# EAGLE board hello-world (EAGLE 6.6.0)
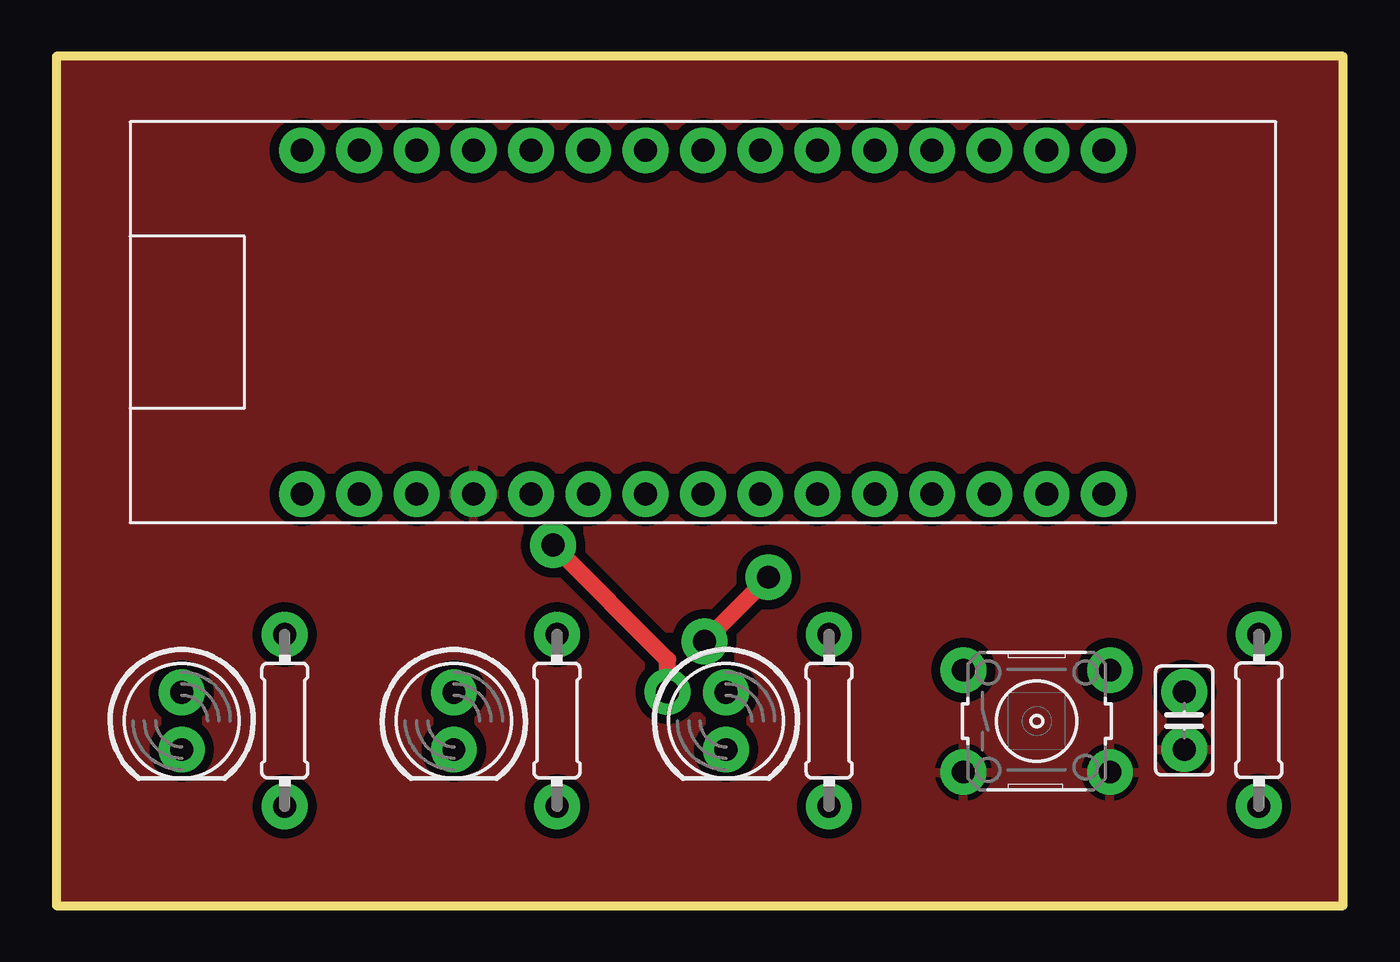
[diagram p0: board, top side]
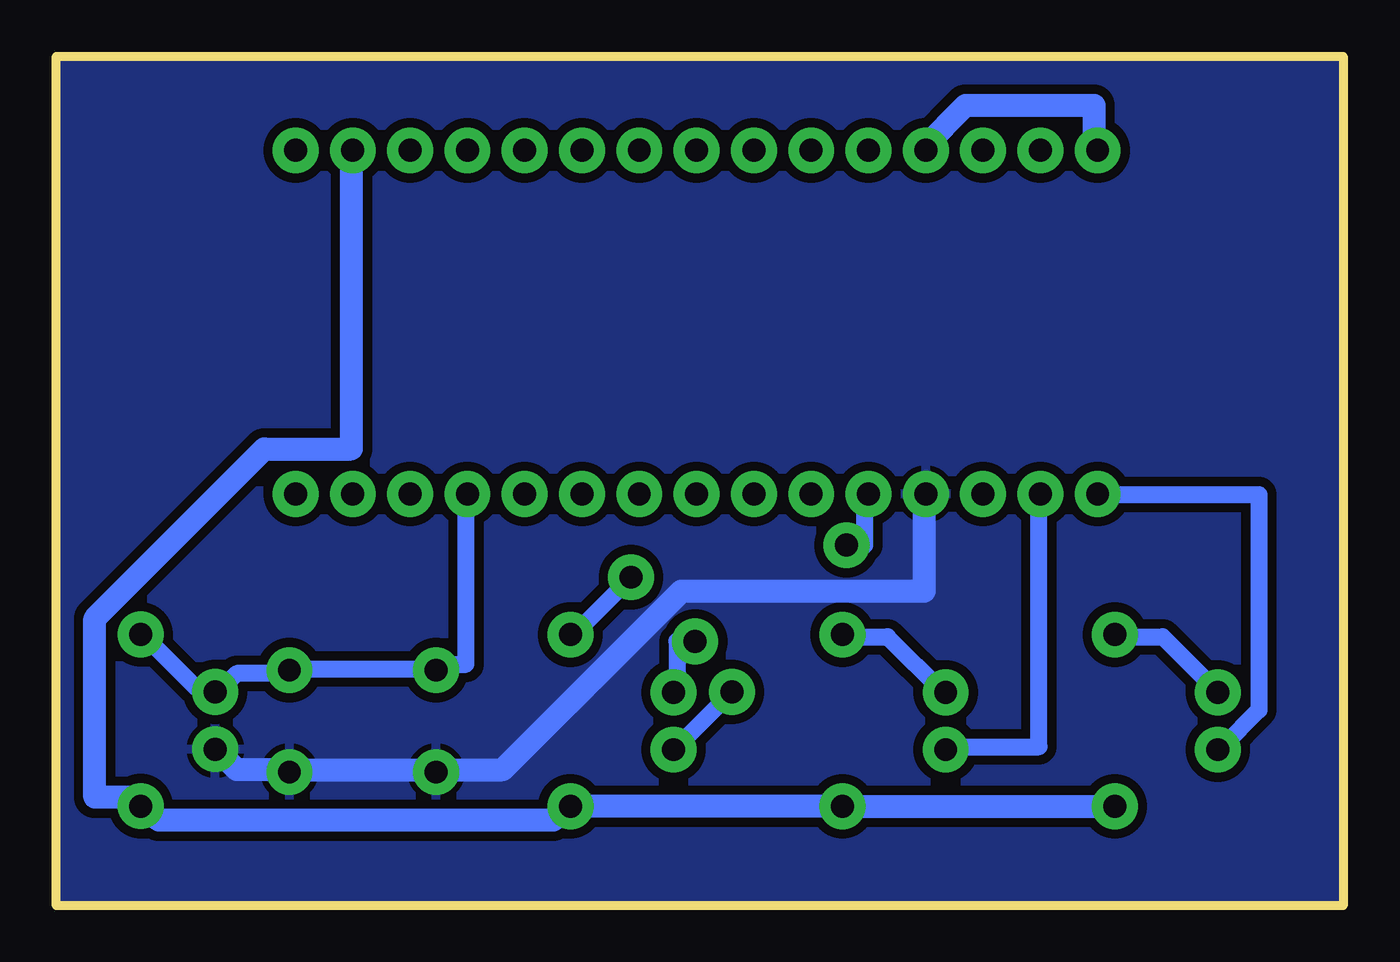
[diagram p1: board, bottom side, seen from below]

Size 57.04 x 37.65 mm. Coordinates in mm from the lower left corner, seen from the top.
Outline: 0,0 57.04,0 57.04,37.65 0,37.65 0,0
Copper layers (1*16): Top 0.035mm / dielectric 1.5mm / Bottom 0.035mm
Design rules "jitpcb": minimum track width 10mil, minimum drill 24mil, track to track 10mil, track to pad 10mil, pad to pad 10mil, via to via 10mil, smd to smd 10mil, copper to edge 0mil, drill to drill 8mil, minimum pad ring 10mil, minimum via ring 8mil, stop-mask expansion 4mil, vias tented up to drill 0mil, thermal gap 10mil
Net classes: 0 default: width 0.762 mm, drill 1.016 mm, clearance 0.406 mm; 1 power: width 1.016 mm, drill 1.016 mm, clearance 0.406 mm to class 0, clearance 0.406 mm

## Footprints (pad centres in the part's own frame; a part is rotated, then mirrored left to right if it is on the bottom)
C025-025X050 = drill 1.016 pad 2.032: 1 -1.27,0; 2 1.27,0
NUCLEO32_DIP = drill 1.016 pad 2.032: CN3_1 -17.78,-7.62; CN3_2 -15.24,-7.62; CN3_3 -12.7,-7.62; CN3_4 -10.16,-7.62; CN3_5 -7.62,-7.62; CN3_6 -5.08,-7.62; CN3_7 -2.54,-7.62; CN3_8 0,-7.62; CN3_9 2.54,-7.62; CN3_10 5.08,-7.62; CN3_11 7.62,-7.62; CN3_12 10.16,-7.62; CN3_13 12.7,-7.62; CN3_14 15.24,-7.62; CN3_15 17.78,-7.62; CN4_1 -17.78,7.62; CN4_2 -15.24,7.62; CN4_3 -12.7,7.62; CN4_4 -10.16,7.62; CN4_5 -7.62,7.62; CN4_6 -5.08,7.62; CN4_7 -2.54,7.62; CN4_8 0,7.62; CN4_9 2.54,7.62; CN4_10 5.08,7.62; CN4_11 7.62,7.62; CN4_12 10.16,7.62; CN4_13 12.7,7.62; CN4_14 15.24,7.62; CN4_15 17.78,7.62
LED5MM = drill 1.016 pad 2.032: A -1.27,0; K 1.27,0
0204/7 = drill 1.016 pad 2.032: 1 -3.81,0; 2 3.81,0
B3F-10XX = drill 1.016 pad 2.032: 1 -3.251,2.261; 2 3.251,2.261; 3 -3.251,-2.261; 4 3.251,-2.261

## Placement (x,y rotation side)
C27  100nf  [C025-025X050]  50,8.21 90 top
C36  [NUCLEO32_DIP]  28.66,25.87 0 top
LED1  [LED5MM]  5.55,8.19 270 top
LED9  [LED5MM]  17.62,8.19 270 top
LED17  [LED5MM]  29.69,8.19 270 top
R2  1k  [0204/7]  10.12,8.21 270 top
R10  1k  [0204/7]  22.19,8.21 270 top
R18  1k  [0204/7]  34.26,8.21 270 top
R26  1k  [0204/7]  53.31,8.22 270 top
SW25  [B3F-10XX]  43.46,8.18 0 top

## Library data of the parts
C27 R2 R10 R18 R26 = rcl
C36 = nucleo
LED1 LED9 LED17 = led
SW25 = switch-omron

## Nets
BOOT-IN: C36.CN3_6
BOOT-OUT: C36.CN3_9
GND [power]: C27.1 C36.CN3_4 SW25.3 SW25.4
IO78: C36.CN3_1 LED1.K
IO79: C36.CN3_2 LED9.K
IO80: C36.CN3_5 LED17.K
IO81: C27.2 C36.CN3_12 R26.1 SW25.1 SW25.2
SCL-OUT: C36.CN3_8
SDA-OUT: C36.CN3_7
UP3: LED1.A R2.1
UP11: LED9.A R10.1
UP19: LED17.A R18.1
V3 [power]: C36.CN4_14 R2.2 R10.2 R18.2 R26.2
V5 [power]: C36.CN4_1 C36.CN4_4

## Tracks (layer width: path | path; a pad name or v marks a point on that pad's centre or on a via)
GND
  Bottom 1.016: C36.CN3_4 18.56,18.22 18.56,13.95 29.33,13.95 37.26,6.03 39.7,6.03 SW25.3 40.31,6.03 46.61,6.03 SW25.4 47.22,6.03 49.04,6.03 49.86,6.84 C27.1
  pour Top: 0,0 57.04,0 57.04,37.65 0,37.65 0,0
  pour Bottom: 0,0 57.04,0 57.04,37.65 0,37.65 0,0
IO78
  Bottom 0.762: LED1.K 5.36,7.04 3.73,8.67 3.73,18.22 10.84,18.22 C36.CN3_1
IO79
  Bottom 0.762: C36.CN3_2 13.48,18.22 13.48,7.04 17.55,7.04 LED9.K
IO80  (via drill 1.02)
  Top 0.762: v22.02,15.98 27.1,10.9 v27.1,9.48
  Bottom 0.762: v22.02,15.98 21.21,15.98 21.21,18.22 C36.CN3_5 | v27.1,9.48 29.54,7.04 LED17.K
IO81
  Bottom 0.762: C36.CN3_12 38.88,18.22 38.88,10.7 39.9,10.7 SW25.1 40.31,10.5 46.61,10.5 SW25.2 47.01,10.29 49.04,10.29 49.86,9.48 C27.2 50.26,9.68 50.87,9.68 53.11,11.92 R26.1
UP3
  Bottom 0.762: LED1.A 5.56,9.48 8,11.92 10.03,11.92 R2.1
UP11
  Bottom 0.762: LED9.A 17.75,9.48 20.19,11.92 22.02,11.92 R10.1
UP19  (via drill 1.02)
  Top 0.762: v31.57,14.56 v28.72,11.72
  Bottom 0.762: v28.72,11.72 29.54,11.72 29.54,9.48 LED17.A | v31.57,14.56 34.01,12.12 34.21,12.12 R18.1
V3
  Bottom 1.016: R2.2 10.23,4.4 22.02,4.4 R10.2 22.63,4.4 34.21,4.4 R18.2 34.62,4.2 35.02,3.79 52.5,3.79 53.11,4.4 R26.2 53.52,4.81 55.34,4.81 55.34,12.73 47.83,20.25 43.96,20.25 43.96,33.46 C36.CN4_14
V5
  Bottom 1.016: C36.CN4_1 11.05,33.66 11.05,35.49 16.74,35.49 18.56,33.66 C36.CN4_4